# Allegro board syn480.brd
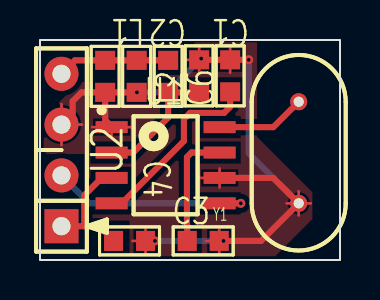
[diagram p0: board, top side]
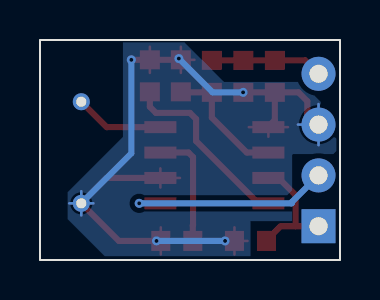
[diagram p1: board, bottom side, seen from below]

Outline 15 x 11 mm; copper layers: TOP, BOTTOM. Coordinates in mm from the lower left corner of the outline.
Outline path: rectangle 0,0 15,11

## Placement (name value [footprint] x y rotation side)
C1  2.7P  [STD0603]  6.41 9.18 270 top
C2  5.6P  [STD0603]  3.26 9.18 270 top
C3  105  [STD0603]  8.16 0.95 0 top
C4  104  [STD0603]  4.48 0.95 0 top
C6  474  [STD0603]  9.51 9.21 90 top
L1  22NH  [STD0603]  4.83 9.18 270 top
L2  27NH  [STD0603]  7.96 9.21 90 top
U1  SYN480  [SOP8]  6.28 4.74 0 top
U2  4P  [ZCZ254-1X4]  1.07 1.69 90 top
Y1  6.7458M  [CRY2P_1100X470]  12.94 2.83 90 top

## Library data of the parts
C1-C4 C6 = CAP NP
L1 L2 = CHOKE
U1 = syn480
U2 = 4P-1: User Part Number: pn; Tolerance: RichardLC
Y1 = ZTB

## Footprints (pads in the part's own frame, mm; a bottom-side part is the same pattern mirrored in y, then rotated)
CRY2P_1100X470
  round 0.85 hole 0.5: 1(0,0) 2(5.08,0)
SOP8
  rect 1.6x0.6 smd: 1(-2.7,1.905) 2(-2.7,0.635) 3(-2.7,-0.635) 4(-2.7,-1.905) 5(2.7,-1.905) 6(2.7,-0.635) 7(2.7,0.635) 8(2.7,1.905)
STD0603
  rect 0.95x1 smd: 1(-0.8,0) 2(0.8,0)
ZCZ254-1X4
  rect 1.7x1.7 hole 0.9: 1(0,0)
  round 1.7 hole 0.9: 2(2.54,0) 3(5.08,0) 4(7.62,0)

## Nets
GND: C2.2 C3.2 C4.2 C6.2 L1.2 L2.2 U1.1(VSS) U1.6(SHU) U2.3 Y1.1
VCC: C4.1 U1.3(VDD) U2.1
ANT: C1.1 C2.1 L1.1 U2.4
DATA: U1.5(D0) U2.2
N00713: C1.2 L2.1 U1.2(ANT)
N00806: C6.1 U1.4(CTH)
N00823: U1.8(REF) Y1.2
N00841: C3.1 U1.7(CAG)

## Via types
v1: diameter 0.45, hole 0.2, TOP to BOTTOM, 6 vias

## Routing (per net, layer and track width the routed paths; a pad name or vN(x,y) marks a point on that pad's centre or on a via; arc(x,y) is an arc through that point)
GND: length 57.1
  TOP w0.127: 2.6,6.64 U1.1 ; U1.1 3.58,6.16 ; U1.1 4.56,6.64 ; 7.28,10.01 L2.2 ; L2.2 7.96,10.66 ; L2.2 7.96,9.36 ; Y1.1 12.94,3.44 ; Y1.1 12.33,2.83 ; Y1.1 13.54,2.83 ; Y1.1 12.94,2.23 ; C4.2 5.28,1.63 ; C4.2 5.28,0.28 ; C4.2 4.62,0.95 ; 8.98,3.62 U1.6 ; U1.6 8,4.1 ; U1.6 8.98,4.58 ; 9.51,10.66 C6.2 9.51,9.36 ; 1.07,5.74 U2.3 ; U2.3 2.1,6.77 ; U2.3 1.07,7.8 ; C3.2 8.96,1.63 ; C3.2 8.31,0.95 ; C3.2 8.96,0.28
  TOP w0.305: v1(4.85,8.38) L1.2 C2.2 ; U2.3 1.63,7.33 1.63,7.94 2.08,8.38 C2.2 ; v1(10.43,10.01) C6.2 L2.2 ; U1.6 11.67,4.1 Y1.1 11.06,0.95 v1(9.18,0.95) C3.2 ; C4.2 v1(5.75,0.95) ; U1.1 3.58,6.68 3.26,7 C2.2
  BOTTOM w0.127: U2.3 1.07,7.8 ; U2.3 1.07,5.74 ; U2.3 2.1,6.77 ; 12.94,2.23 Y1.1 ; Y1.1 12.33,2.83 ; Y1.1 12.94,3.44 ; Y1.1 13.54,2.83
  BOTTOM w0.305: Y1.1 10.43,5.34 v1(10.43,10.01) ; v1(4.85,8.38) 6.37,8.38 v1(8.06,10.07) ; v1(5.75,0.95) v1(9.18,0.95)
VCC: length 6.2
  TOP w0.305: 2.22,1.69 2.97,1.69 3.68,0.98 C4.1 ; 2.22,1.69 2.22,3.24 3.08,4.1 U1.3 ; 2.22,1.69 U2.1
ANT: length 5.6
  TOP w0.305: U2.4 1.75,9.98 C2.1 L1.1 C1.1
DATA: length 10.6
  TOP w0.305: U1.5 v1(10.04,2.83)
  BOTTOM w0.305: v1(10.04,2.83) 2.43,2.83 2.39,2.86 2.39,2.91 U2.2
N00713: length 6.4
  TOP w0.305: U1.2 4.66,5.37 6.41,7.12 C1.2 7.93,8.38 L2.1
N00806: length 9.3
  TOP w0.305: C6.1 9.51,7.66 9.2,7.35 7.5,7.35 7.2,7.05 7.2,5.95 4.08,2.83 U1.4
N00823: length 4.5
  TOP w0.305: 12.94,7.91 11.67,6.64 U1.8
N00841: length 5.9
  TOP w0.305: U1.7 7.58,5.37 7.35,5.14 7.35,1.75 7.36,1.73 C3.1

## Copper pours and planes (outline as drawn; the poured copper is in the pictures)
GND on TOP: 0.18,7.66 0.18,5.45 0.34,5.3 2.34,5.3 2.39,5.25 2.39,1.97 4.45,1.97 4.48,1.94 4.48,0.19 11.77,0.19 13.62,2.05 13.62,3.39 10.85,6.16 10.85,10.88 7.78,10.88 5.8,8.9 1.96,8.9 0.72,7.66
GND on BOTTOM: 0.18,7.66 0.18,5.45 0.34,5.3 2.34,5.3 2.39,5.25 2.39,1.97 2.42,1.94 4.48,1.94 4.48,0.19 11.77,0.19 13.62,2.05 13.62,3.39 10.85,6.16 10.85,10.88 7.78,10.88 5.8,8.9 1.96,8.9 0.72,7.66

## Text on the board
Ref Des/Assembly Bottom: ANT | DATA | GND | VCC
DISPLAY_TOP: FIGURE | SIZE | 7.87 | 19.69 | 35.43 | DRILL CHART: TOP to BOTTOM | ALL UNITS ARE IN MILS | PLATED | QTY | 6 | 2 | 4
